# Altium PCB RasPiComputePCB.PcbDoc
Units mm, origin at the board's own origin, x right, y up, seen from the top; angles counter-clockwise.
Board outline 100 x 80 mm, 2 copper layers (Top Layer, Bottom Layer), stack 0.579 mm thick; 25 components, 131 nets, 353 pads, 0 vias.
Unrouted connection lines stored in the file: 150.
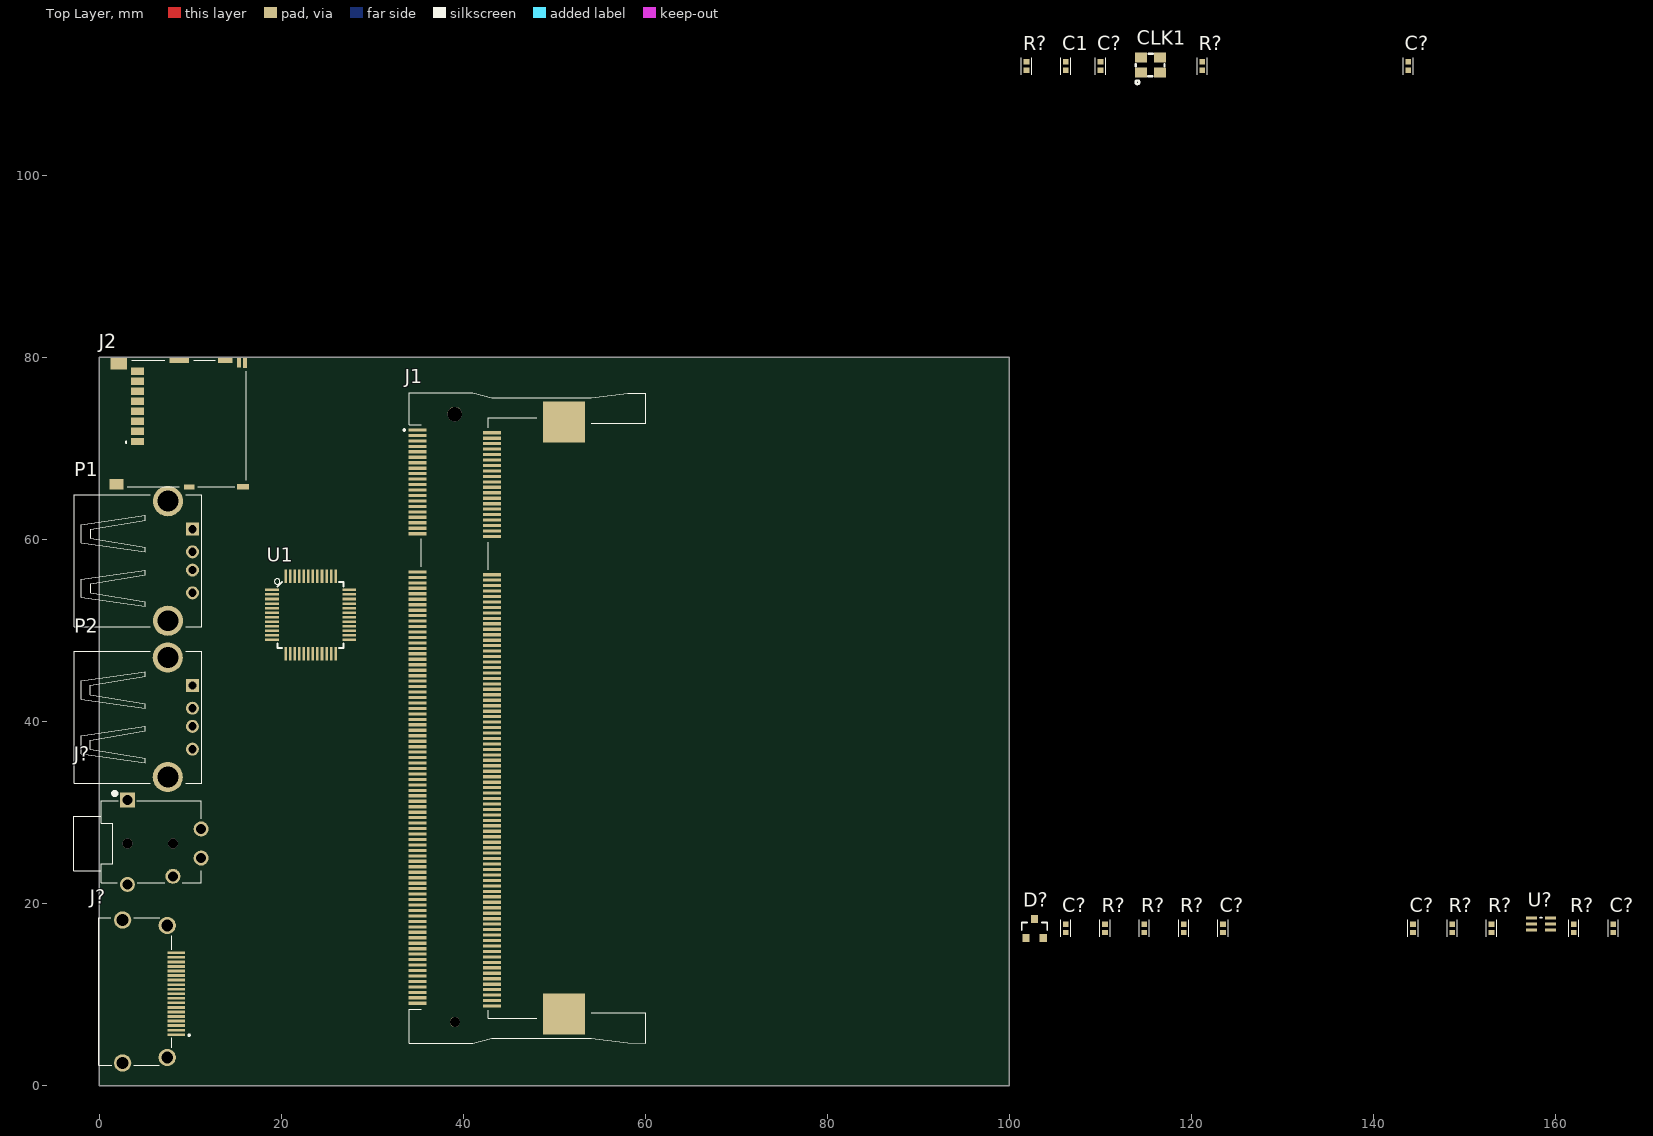
[diagram p0: Top Layer view]
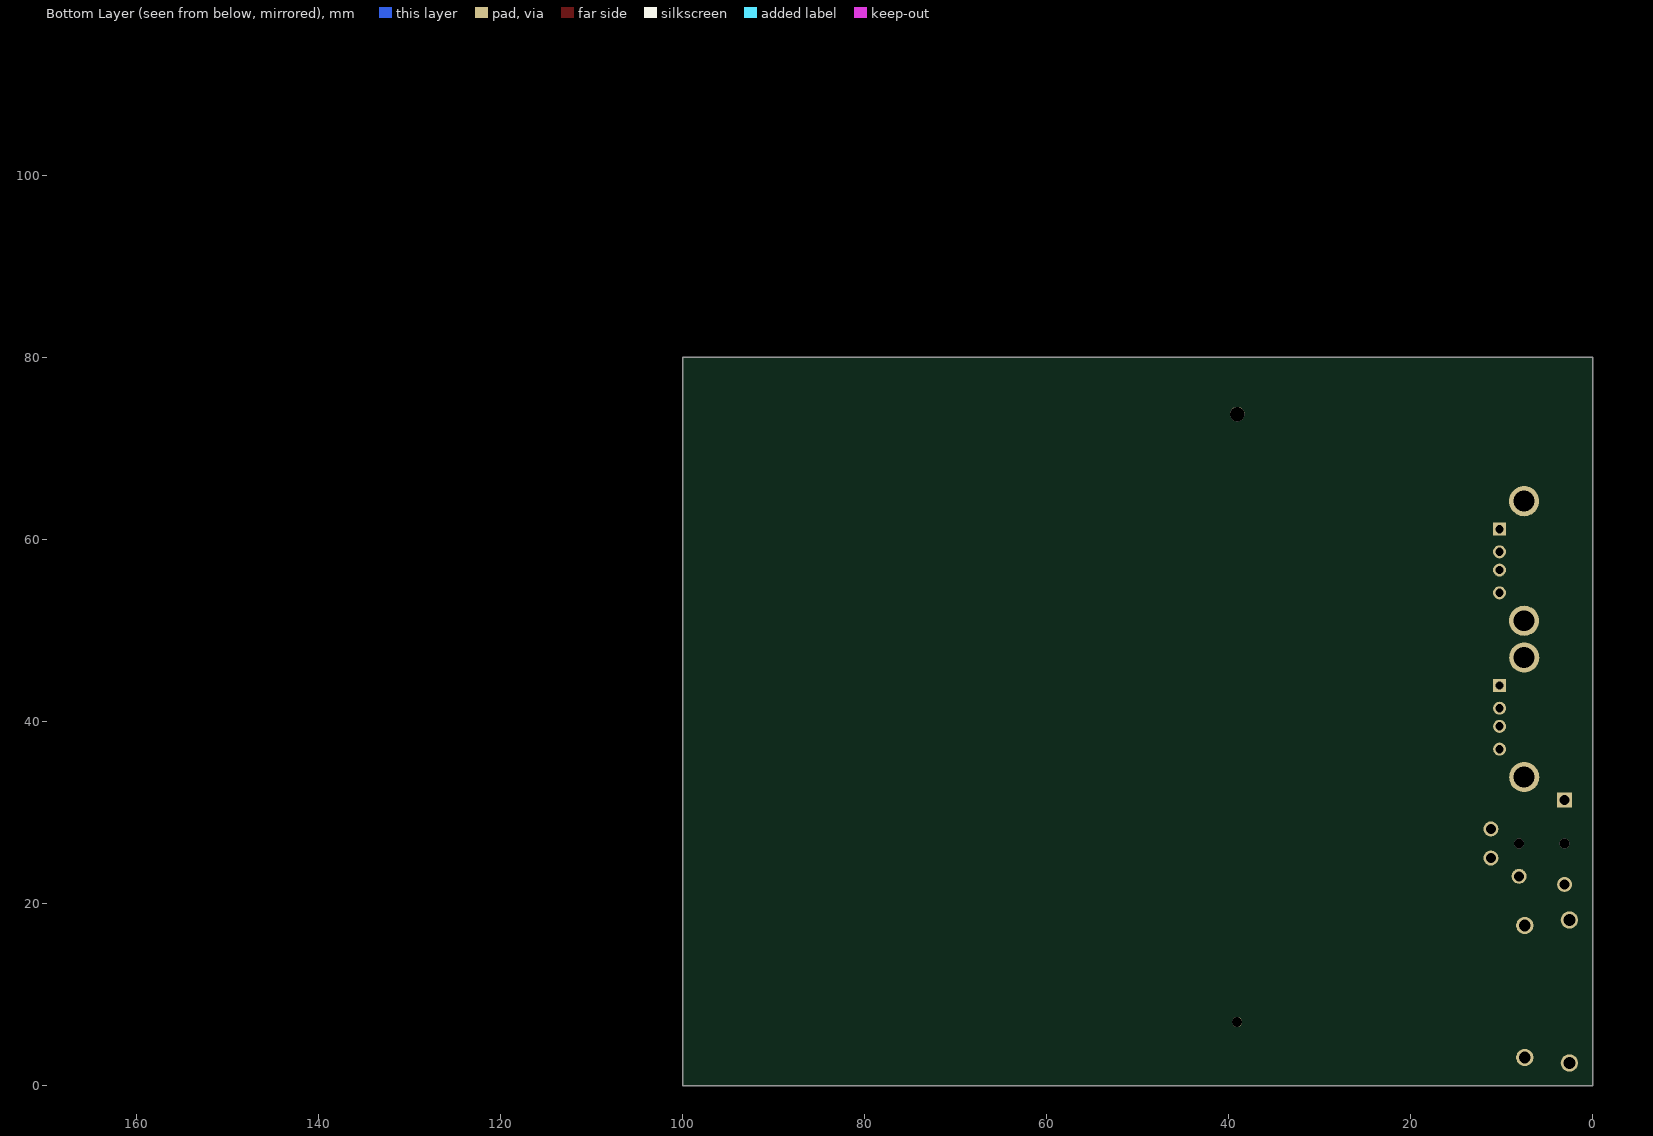
[diagram p1: Bottom Layer view, seen from below]

## Layer stack, top to bottom
Top Solder: solder mask 0.0102, Solder Resist, Dk 3.5
Top Layer: signal copper 0.0356
Dielectric 1: core 0.508, FR-4, Dk 4.2
Bottom Layer: signal copper 0.0356
Bottom Solder: solder mask 0.0102, Solder Resist, Dk 3.5

## Board outline
0,0 100,0 100,80 0,80

## Design rules (kind name [scope] priority, off if disabled: settings)
Clearance 90ohm_RF [InDifferentialPairClass('90Ohm_USB') vs InPolygon] p1: gap=0.762 ignorepadtopadclearanceinfootprint=FALSE
Clearance [All] p2: gap=0.178 ignorepadtopadclearanceinfootprint=FALSE
DiffPairsRouting [InDifferentialPairClass('90Ohm_USB')] p1: maxlimit=0.508 minlimit=0.178 mostfreqgap=0.178 toplayer_minwidth=0.279 toplayer_maxwidth=0.432 toplayer_prefwidth=0.432 bottomlayer_minwidth=0.279 bottomlayer_maxwidth=0.432 bottomlayer_prefwidth=0.432 maxuncoupledlength=12.7
PolygonConnect [All] p1: connectstyle=Relief reliefconductorwidth=0.254 reliefentries=4 polygonreliefangle="90 Angle" airgapwidth=0.254
RoomDefinition AUDIO [InComponentClass('AUDIO')] p1: confinementstyle=ConfineIn formatcopy=TRUE lockcomponents=FALSE outline 101.138,1.424 168.931,1.424 168.931,116.257 101.138,116.257
RoomDefinition USB_HUB [InComponentClass('USB_HUB')] p2: confinementstyle=ConfineIn formatcopy=TRUE lockcomponents=FALSE outline -106.507,-91.794 -55.707,-91.794 -55.707,-66.394 -106.507,-66.394
RoomDefinition Connectors [InComponentClass('Connectors')] p3: confinementstyle=ConfineIn formatcopy=TRUE lockcomponents=FALSE outline -106.507,-91.794 -55.707,-91.794 -55.707,-66.394 -106.507,-66.394
RoutingVias [All] p1: holewidth=0.711 width=1.27 viastyle="Through Hole" minholewidth=0.711 minwidth=1.27 maxholewidth=0.711 maxwidth=1.27
SolderMaskExpansion [All] p1: expansion=0.102
Width [All] p1: maxlimit=0.762 minlimit=0.178 preferedwidth=0.279 minimp=50.000000 maximp=50.000000 favimp=50.000000
29 further rules are at their usual default settings.

## Classes and differential pairs
component class USB_HUB: C1 C? CLK1 P1 P2 R? U1
component class Connectors: J1 J2 J?
differential pair class 90Ohm_USB: DS0_USB1 DS0_USB2 US0_USB0
component class AUDIO: C? D? J? R? U?
differential pair DS0_USB1: +DS0_USB1_P -DS0_USB1_N
differential pair US0_USB0: +US0_USB0_P -US0_USB0_N
differential pair DS0_USB2: +DS0_USB2_P -DS0_USB2_N

## Components (designator, comment, footprint, x,y, rotation, side; value= is the part's Value field where it differs from the comment)
C1 "0.01uF" 0402C 106.218,112.016 r90 top
C? "100nF" 0402C 110.028,112.016 r90 top
C? "100nF" 0402C 143.861,112.016 r90 top
C? "100nF" 0402C 106.218,17.274 r90 top
C? "47uF" 0402C 123.49,17.274 r90 top
C? "47uF" 0402C 166.365,17.274 r90 top
C? "100nF" 0402C 144.369,17.274 r90 top
CLK1 "ASE-48.000MHZ-LC-T" ASE-48.000MHZ-LC-T 115.514,112.117 r0 top
D? "BAV99" SOT23-3 102.789,17.197 r0 top
J1 "1717254-1" TE_1717254-1_1717254-1(Primary) 39.08,40.386 r90 top
J2 "2201778-1" TE_2201778-1 8.966,72.746 r270 top
J? "5-1903015-1" TE_5-1903015-1_5-1903015-1(Primary) 8.484,10.334 r270 top
J? "SJ-43515TS" CUI_SJ-43515TS 5.715,26.594 r0 top
P1 "87520-0010BLF" FCI_87520-0010BLF 7.552,57.642 r270 top
P2 "87520-0010BLF" FCI_87520-0010BLF 7.544,40.462 r270 top
R? "100k" 0402C 121.204,112.016 r90 top
R? "649" 0402C 101.9,112.016 r90 top
R? "1.8k" 0402C 114.854,17.274 r90 top
R? "100" 0402C 110.536,17.274 r90 top
R? "220" 0402C 119.172,17.274 r90 top
R? "1.8k" 0402C 153.005,17.274 r90 top
R? "100" 0402C 148.687,17.274 r90 top
R? "220" 0402C 162.047,17.274 r90 top
U1 "CY7C65632-48AXCT" TQFP-48 23.241,51.714 r0 top
U? "NC7WZ16P6X" SOT65P210X110-6N 158.44,17.756 r0 top

## Footprints (in the part's own frame and the unit in brackets; to place one, negate y for a bottom-side part, rotate by r counter-clockwise, add the part's x,y. Pads: shape width x height; smd on the part's side, far side on the other; paste and mask are expansions set on the pad)
0402C [mm]
  rect 0.6x0.62 smd: 1(-0.46,0) 2(0.46,0)
  silkscreen extent -0.94,-0.56 0.94,0.56, body extent -0.5,-0.25 0.5,0.25, height 0.55
ASE-48.000MHZ-LC-T [mm] "OSC XO 48.000MHZ CMOS SMD"
  rect 1.3x1.1 smd: 1(-1.025,-0.825) 2(1.075,-0.825) 3(1.075,0.825) 4(-1.025,0.825)
  silkscreen extent -1.63,-2.08 1.55,1.25
CUI_SJ-43515TS [mm]
  rect 1.65x1.65 hole 1.1: 1(-2.6,4.8)
  round 1.65 hole 1.1: 2(2.4,-3.6) 3(5.5,1.6) 4(-2.6,-4.5) 5(5.5,-1.6)
  round 1.1 hole 1.1 unplated: None(-2.6,0) None(2.4,0)
  silkscreen extent -8.5,-4.3 5.5,5.7, body extent -8.02,-5.33 5.98,4.87, height 5.29
FCI_87520-0010BLF [mm]
  rect 1.428x1.428 hole 0.92: 1(-3.5,2.71)
  round 1.428 hole 0.92: 2(-1,2.71) 3(1,2.71) 4(3.5,2.71)
  round 3.316 hole 2.3: P1(-6.57,0) P2(6.57,0)
  silkscreen extent -7.25,-10.3 7.25,3.75, body extent -7.25,-10.19 7.25,3.81, height 7.69
SOT23-3 [mm]
  rect 0.8x0.9 smd: 1(-0.95,-1) 2(0.95,-1) 3(0,1.1)
  silkscreen extent -1.4,-0.1 1.4,0.7, body extent -1.5,-1.39 1.5,1.44, height 1.2
SOT65P210X110-6N [mil]
  rect 46x14 smd: 1(-41,26) 2(-41,0) 3(-41,-26) 4(41,-26) 5(41,0) 6(41,26)
  silkscreen extent -5,27 5,28, body extent -47,-43 47,43, height 43
TE_5-1903015-1_5-1903015-1(Primary) [mm]
  rect 0.3x1.9 smd: 1(4.75,0) 2(4.25,0) 3(3.75,0) 4(3.25,0) 5(2.75,0) 6(2.25,0) 7(1.75,0) 8(1.25,0) 9(0.75,0) 10(0.25,0) 11(-0.25,0) 12(-0.75,0) 13(-1.25,0) 14(-1.75,0) 15(-2.25,0) 16(-2.75,0) 17(-3.25,0) 18(-3.75,0) 19(-4.25,0)
  round 1.9 hole 1.3: SH1(7.25,-1) SH2(-7.25,-1) SH3(-7.85,-5.9) SH4(7.85,-5.9)
  silkscreen extent -8.1,-8.5 8.1,1.5, body extent -8.1,-9.53 8.1,0.32, height 6.1
TE_1717254-1_1717254-1(Primary) [mm]
  rect 0.35x2 smd: 1(31.65,4.1) 2(31.35,-4.1) 3(31.05,4.1) 4(30.75,-4.1) 5(30.45,4.1) 6(30.15,-4.1) 7(29.85,4.1) 8(29.55,-4.1) 9(29.25,4.1) 10(28.95,-4.1) 11(28.65,4.1) 12(28.35,-4.1) 13(28.05,4.1) 14(27.75,-4.1) 15(27.45,4.1) 16(27.15,-4.1) 17(26.85,4.1) 18(26.55,-4.1) 19(26.25,4.1) 20(25.95,-4.1) 21(25.65,4.1) 22(25.35,-4.1) 23(25.05,4.1) 24(24.75,-4.1) 25(24.45,4.1) 26(24.15,-4.1) 27(23.85,4.1) 28(23.55,-4.1) 29(23.25,4.1) 30(22.95,-4.1) 31(22.65,4.1) 32(22.35,-4.1) 33(22.05,4.1) 34(21.75,-4.1) 35(21.45,4.1) 36(21.15,-4.1) 37(20.85,4.1) 38(20.55,-4.1) 39(20.25,4.1) 40(19.95,-4.1) 41(16.05,4.1) 42(15.75,-4.1) 43(15.45,4.1) 44(15.15,-4.1) 45(14.85,4.1) 46(14.55,-4.1) 47(14.25,4.1) 48(13.95,-4.1) 49(13.65,4.1) 50(13.35,-4.1) 51(13.05,4.1) 52(12.75,-4.1) 53(12.45,4.1) 54(12.15,-4.1) 55(11.85,4.1) 56(11.55,-4.1) 57(11.25,4.1) 58(10.95,-4.1) 59(10.65,4.1) 60(10.35,-4.1) 61(10.05,4.1) 62(9.75,-4.1) 63(9.45,4.1) 64(9.15,-4.1) 65(8.85,4.1) 66(8.55,-4.1) 67(8.25,4.1) 68(7.95,-4.1) 69(7.65,4.1) 70(7.35,-4.1) 71(7.05,4.1) 72(6.75,-4.1) 73(6.45,4.1) 74(6.15,-4.1) 75(5.85,4.1) 76(5.55,-4.1) 77(5.25,4.1) 78(4.95,-4.1) 79(4.65,4.1) 80(4.35,-4.1) 81(4.05,4.1) 82(3.75,-4.1) 83(3.45,4.1) 84(3.15,-4.1) 85(2.85,4.1) 86(2.55,-4.1) 87(2.25,4.1) 88(1.95,-4.1) 89(1.65,4.1) 90(1.35,-4.1) 91(1.05,4.1) 92(0.75,-4.1) 93(0.45,4.1) 94(0.15,-4.1) 95(-0.15,4.1) 96(-0.45,-4.1) 97(-0.75,4.1) 98(-1.05,-4.1) 99(-1.35,4.1) 100(-1.65,-4.1) 101(-1.95,4.1) 102(-2.25,-4.1) 103(-2.55,4.1) 104(-2.85,-4.1) 105(-3.15,4.1) 106(-3.45,-4.1) 107(-3.75,4.1) 108(-4.05,-4.1) 109(-4.35,4.1) 110(-4.65,-4.1) 111(-4.95,4.1) 112(-5.25,-4.1) 113(-5.55,4.1) 114(-5.85,-4.1) 115(-6.15,4.1) 116(-6.45,-4.1) 117(-6.75,4.1) 118(-7.05,-4.1) 119(-7.35,4.1) 120(-7.65,-4.1) 121(-7.95,4.1) 122(-8.25,-4.1) 123(-8.55,4.1) 124(-8.85,-4.1) 125(-9.15,4.1) 126(-9.45,-4.1) 127(-9.75,4.1) 128(-10.05,-4.1) 129(-10.35,4.1) 130(-10.65,-4.1) 131(-10.95,4.1) 132(-11.25,-4.1) 133(-11.55,4.1) 134(-11.85,-4.1) 135(-12.15,4.1) 136(-12.45,-4.1) 137(-12.75,4.1) 138(-13.05,-4.1) 139(-13.35,4.1) 140(-13.65,-4.1) 141(-13.95,4.1) 142(-14.25,-4.1) 143(-14.55,4.1) 144(-14.85,-4.1) 145(-15.15,4.1) 146(-15.45,-4.1) 147(-15.75,4.1) 148(-16.05,-4.1) 149(-16.35,4.1) 150(-16.65,-4.1) 151(-16.95,4.1) 152(-17.25,-4.1) 153(-17.55,4.1) 154(-17.85,-4.1) 155(-18.15,4.1) 156(-18.45,-4.1) 157(-18.75,4.1) 158(-19.05,-4.1) 159(-19.35,4.1) 160(-19.65,-4.1) 161(-19.95,4.1) 162(-20.25,-4.1) 163(-20.55,4.1) 164(-20.85,-4.1) 165(-21.15,4.1) 166(-21.45,-4.1) 167(-21.75,4.1) 168(-22.05,-4.1) 169(-22.35,4.1) 170(-22.65,-4.1) 171(-22.95,4.1) 172(-23.25,-4.1) 173(-23.55,4.1) 174(-23.85,-4.1) 175(-24.15,4.1) 176(-24.45,-4.1) 177(-24.75,4.1) 178(-25.05,-4.1) 179(-25.35,4.1) 180(-25.65,-4.1) 181(-25.95,4.1) 182(-26.25,-4.1) 183(-26.55,4.1) 184(-26.85,-4.1) 185(-27.15,4.1) 186(-27.45,-4.1) 187(-27.75,4.1) 188(-28.05,-4.1) 189(-28.35,4.1) 190(-28.65,-4.1) 191(-28.95,4.1) 192(-29.25,-4.1) 193(-29.55,4.1) 194(-29.85,-4.1) 195(-30.15,4.1) 196(-30.45,-4.1) 197(-30.75,4.1) 198(-31.05,-4.1) 199(-31.35,4.1) 200(-31.65,-4.1)
  round 1.1 hole 1.1 unplated: None(-33.4,0)
  round 1.6 hole 1.6 unplated: None(33.4,0)
  rect 4.5x4.6 smd: S1(-32.55,-12) S2(32.55,-12)
  silkscreen extent -35.75,-21 35.75,5.65, body extent -35.75,-21.04 35.75,5, height 5.23
TE_2201778-1 [mm]
  rect 0.8x1.4 smd: 1(1.965,-4.75) 2(0.865,-4.75) 3(-0.235,-4.75) 4(-1.335,-4.75) 5(-2.435,-4.75) 6(-3.535,-4.75) 7(-4.635,-4.75) 8(-5.735,-4.75)
  rect 1.15x0.45 smd: 9(-6.7,7.075)
  rect 1.1x0.45 smd: 10(-6.725,6.415)
  rect 1.35x1.8 smd: 11(-6.625,-6.8)
  rect 0.65x2.14 smd: 12(-6.95,-0.17)
  rect 0.65x1.6 smd: 13(-6.95,4.91)
  rect 0.65x1.3 smd: 14(6.95,6.85)
  rect 0.6x1.15 smd: 15(6.975,0.925)
  rect 1.16x1.5 smd: 16(6.695,-7.05)
  silkscreen extent -6.98,-6.11 6.98,7.2, body extent -7.04,-8.96 6.99,7.24, height 1.8
TQFP-48 [mm]
  rect 1.5x0.28 smd: 1(-4.25,2.75) 2(-4.25,2.25) 3(-4.25,1.75) 4(-4.25,1.25) 5(-4.25,0.75) 6(-4.25,0.25) 7(-4.25,-0.25) 8(-4.25,-0.75) 9(-4.25,-1.25) 10(-4.25,-1.75) 11(-4.25,-2.25) 12(-4.25,-2.75) 25(4.25,-2.75) 26(4.25,-2.25) 27(4.25,-1.75) 28(4.25,-1.25) 29(4.25,-0.75) 30(4.25,-0.25) 31(4.25,0.25) 32(4.25,0.75) 33(4.25,1.25) 34(4.25,1.75) 35(4.25,2.25) 36(4.25,2.75)
  rect 0.28x1.5 smd: 13(-2.75,-4.25) 14(-2.25,-4.25) 15(-1.75,-4.25) 16(-1.25,-4.25) 17(-0.75,-4.25) 18(-0.25,-4.25) 19(0.25,-4.25) 20(0.75,-4.25) 21(1.25,-4.25) 22(1.75,-4.25) 23(2.25,-4.25) 24(2.75,-4.25) 37(2.75,4.25) 38(2.25,4.25) 39(1.75,4.25) 40(1.25,4.25) 41(0.75,4.25) 42(0.25,4.25) 43(-0.25,4.25) 44(-0.75,4.25) 45(-1.25,4.25) 46(-1.75,4.25) 47(-2.25,4.25) 48(-2.75,4.25)
  silkscreen extent -3.97,-3.63 3.63,3.97, body extent -4.5,-4.5 4.5,4.5, height 1.1

## Part data
C1 C? C? C? C? C? C?: library part C, "Capacitor", Power_WV_SRF=25V
CLK1: "OSC XO 48.000MHZ CMOS SMD"
D?: "Diode, Small Signal; 250 mA; 1.25 V _Max._; 300 mW; 430 K/W; 70 V; 6 nS _Max._", Package="SOT-23-3 Vishay", Availability=Unavailable, MF="ON Semiconductor", MP=BAV99, Price="0.07 USD", SnapEDA_Link=https://www.snapeda.com/parts/BAV99/ON%20Semiconductor/view-part/?ref=snap
J1: "EMBOSS ASS'Y DDR SODIMM SOCKET", Package=None, Centerline_Pitch=".6 mm[.024 in]", Digi-Key_Part_Number=A111047CT-ND, Digi-Key_Purchase_URL=https://www.digikey.com/product-detail/en/te-connectivity-amp-connectors/1717254-1/A111047CT-ND/4142431?utm_source=snapeda&utm_medium=aggregator&utm_campaign=symbol, EU_RoHS_Compliance=Compliant, Link=http://www.te.com/usa-en/product-1717254-1.html, MF="TE Connectivity", MP=1717254-1, Number_of_Positions=200, Product_Type=Socket, SnapEDA_Link=https://www.snapeda.com/parts/1717254-1/TE%20Connectivity%20AMP%20Connectors/view-part/?ref=snap
J2: "MICRO SD PUSH PUSH LOW PROFILE TYPE", Package=None, Availability=Good, Centerline_Pitch="1.1 mm[.04 in]", EU_RoHS_Compliance=Compliant, Link=http://www.te.com/usa-en/product-2201778-1.html, MF="TE Connectivity", MP=2201778-1, Number_of_Positions=8, Price="2.18 USD", Product_Type="Removable Memory Products", SnapEDA_Link=https://www.snapeda.com/parts/2201778-1/TE%20Connectivity%20AMP%20Connectors/view-part/?ref=snap
J?: "Conn HDMI RCP 19 POS 0.5mm Solder RA SMD 19 Terminal 1 Port Embossed T/R", Package=None, Availability=Good, EU_RoHS_Compliance=Compliant, Link=http://www.te.com/usa-en/product-5-1903015-1.html, MF="TE Connectivity", MP=5-1903015-1, Price="1.43 USD", SnapEDA_Link=https://www.snapeda.com/parts/5-1903015-1/TE%20Connectivity%20AMP%20Connectors/view-part/?ref=snap
J?: "4 Conductor PCB Mount Low Profile 3.5 mm Audio Jack", Package=None, Availability=Good, MF=CUI, MP=SJ-43515TS, Price="0.73 USD", SnapEDA_Link=https://www.snapeda.com/parts/SJ-43515TS/CUI/view-part/?ref=snap
P1 P2: "87520 Series Single Port 4 Contact Unshielded Board Lock USB-A Receptacle", Package=None, Digi-Key_Part_Number=609-1045-ND, Digi-Key_Purchase_URL=https://www.digikey.com/product-detail/en/amphenol-fci/87520-0010BLF/609-1045-ND/1001359?utm_source=snapeda&utm_medium=aggregator&utm_campaign=symbol, MF="Amphenol ICC", MP=87520-0010BLF, SnapEDA_Link=https://www.snapeda.com/parts/87520-0010BLF/Amphenol%20ICC/view-part/?ref=snap
R? R? R? R? R? R? R? R?: library part R, "Resistor", Tolerance=5%
U?: "NC7WZ16 Series 5.5 V Surface Mount TinyLogic UHS Dual Buffer - SC-70-6", Package="SC-70-6 ON Semiconductor", Availability=Good, MF="ON Semiconductor", MP=NC7WZ16P6X, Price="0.13 USD", SnapEDA_Link=https://www.snapeda.com/parts/NC7WZ16P6X/ON%20Semiconductor/view-part/?ref=snap

## Nets (pads, with @x,y where several pads share a name; then routed paths per layer and width w, separated by ;. In a path a pad name is that pad's centre, name@x,y a point inside that pad or via, vN(x,y) a via of type N, cw(c..) or ccw(c..) an arc to the next point about the centre after c; other vN are vias at no path point)
1V8: J1.183 J1.184 J1.185 J1.186
3V3: C1.1 CLK1.4 D?.2 J1.191 J1.192 J1.193 J1.194 R?.1@121.204,111.556 U1.1 U1.7 U1.12 U1.16 U1.19 U1.23 U1.32 U1.34 U1.37 U1.38 U1.44 U?.5
5V: C?.1@110.028,111.556 C?.1@143.861,111.556 P1.1 P2.1
DS0_USB1_N: P1.2 U1.5
DS0_USB1_P: P1.3 U1.6
DS0_USB2_N: P2.2 U1.9
DS0_USB2_P: P2.3 U1.10
DS0_USB3_N: U1.17
DS0_USB3_P: U1.18
DS0_USB4_N: U1.21
DS0_USB4_P: U1.22
GND: C1.2 C?.1@106.218,16.814 C?.1@144.369,16.814 C?.2@110.028,112.476 C?.2@143.861,112.476 CLK1.2 D?.1 J1.1 J1.7 J1.8 J1.13 J1.14 J1.19 J1.20 J1.25 J1.26 J1.31 J1.32 J1.37 J1.38 J1.43 J1.44 J1.49 J1.50 J1.55 J1.56 J1.61 J1.62 J1.67 J1.68 J1.73 J1.74 J1.79 J1.80 J1.85 J1.86 J1.91 J1.92 J1.97 J1.98 J1.103 J1.104 J1.109 J1.110 J1.115 J1.116 J1.121 J1.122 J1.127 J1.133 J1.134 J1.139 J1.140 J1.145 J1.146 J1.151 J1.152 J1.157 J1.163 J1.164 J1.168 J1.169 J1.170 J1.181 J1.182 J1.187 J1.188 J1.195 J1.196 J1.S1 J1.S2 J2.6 J2.11 J2.12 J2.13 J2.14 J2.15 J2.16 J?.4@3.115,22.094 P1.4 P2.4 R?.1@101.9,111.556 R?.1@110.536,16.814 R?.1@114.854,16.814 R?.1@148.687,16.814 R?.1@153.005,16.814 U1.2 U1.8 U1.13 U1.20 U1.24 U1.25 U1.27 U1.33 U?.2
NetC?_1: C?.1@166.365,16.814 C?.2@144.369,17.734 R?.2@148.687,17.734 R?.2@162.047,17.734
NetC?_2: C?.2@123.49,17.734 J?.3@11.215,28.194 R?.2@114.854,17.734
NetCLK1_3: CLK1.3 U1.14
NetD?_3: D?.3 J?.1@3.115,31.394
NetJ1_2: J1.2
NetJ1_3: J1.3
NetJ1_4: J1.4 J1.6 J2.4
NetJ1_5: J1.5
NetJ1_9: J1.9
NetJ1_10: J1.10 J2.5
NetJ1_11: J1.11
NetJ1_12: J1.12 J2.3
NetJ1_15: J1.15
NetJ1_16: J1.16 J2.7
NetJ1_17: J1.17
NetJ1_18: J1.18 J2.8
NetJ1_21: J1.21
NetJ1_22: J1.22 J2.1
NetJ1_23: J1.23
NetJ1_24: J1.24 J2.2
NetJ1_27: J1.27
NetJ1_28: J1.28
NetJ1_29: J1.29
NetJ1_30: J1.30
NetJ1_33: J1.33
NetJ1_34: J1.34
NetJ1_35: J1.35
NetJ1_36: J1.36
NetJ1_39: J1.39 J1.40
NetJ1_41: J1.41 J1.42
NetJ1_45: J1.45
NetJ1_46: J1.46
NetJ1_47: J1.47
NetJ1_48: J1.48
NetJ1_51: J1.51
NetJ1_52: J1.52
NetJ1_53: J1.53
NetJ1_54: J1.54
NetJ1_57: J1.57
NetJ1_58: J1.58
NetJ1_59: J1.59
NetJ1_60: J1.60
NetJ1_63: J1.63
NetJ1_64: J1.64
NetJ1_65: J1.65
NetJ1_66: J1.66
NetJ1_69: J1.69
NetJ1_70: J1.70 U?.1
NetJ1_71: J1.71
NetJ1_72: J1.72
NetJ1_75: J1.75
NetJ1_76: J1.76
NetJ1_77: J1.77
NetJ1_78: J1.78
NetJ1_81: J1.81
NetJ1_82: J1.82
NetJ1_83: J1.83
NetJ1_84: J1.84 U?.3
NetJ1_87: J1.87
NetJ1_88: J1.88
NetJ1_89: J1.89
NetJ1_90: J1.90
NetJ1_93: J1.93
NetJ1_94: J1.94
NetJ1_95: J1.95
NetJ1_96: J1.96
NetJ1_99: J1.99
NetJ1_100: J1.100
NetJ1_101: J1.101
NetJ1_102: J1.102
NetJ1_105: J1.105
NetJ1_106: J1.106
NetJ1_107: J1.107
NetJ1_108: J1.108
NetJ1_111: J1.111
NetJ1_112: J1.112
NetJ1_113: J1.113
NetJ1_114: J1.114
NetJ1_117: J1.117
NetJ1_118: J1.118
NetJ1_119: J1.119
NetJ1_120: J1.120
NetJ1_123: J1.123
NetJ1_125: J1.125
NetJ1_129: J1.129
NetJ1_131: J1.131
NetJ1_135: J1.135
NetJ1_136: J1.136
NetJ1_137: J1.137
NetJ1_138: J1.138
NetJ1_141: J1.141
NetJ1_142: J1.142
NetJ1_143: J1.143
NetJ1_144: J1.144
NetJ1_147: J1.147
NetJ1_148: J1.148
NetJ1_149: J1.149
NetJ1_150: J1.150
NetJ1_153: J1.153
NetJ1_155: J1.155
NetJ1_159: J1.159
NetJ1_161: J1.161
NetJ1_166: J1.166
NetJ1_171: J1.171
NetJ1_172: J1.172
NetJ1_173: J1.173
NetJ1_174: J1.174
NetJ1_175: J1.175
NetJ1_176: J1.176
NetJ1_177: J1.177
NetJ1_178: J1.178
NetJ1_179: J1.179
NetJ1_180: J1.180
NetJ1_189: J1.189 J1.190
NetJ1_197: J1.197 J1.198 J1.199 J1.200
NetR?_1: R?.1@162.047,16.814 U?.6
NetR?_2: R?.2@121.204,112.476 U1.39
US0_USB0_N: J1.167 U1.3
US0_USB0_P: J1.165 U1.4
pads on no net: C?.1@123.49,16.814 C?.2@106.218,17.734 C?.2@166.365,17.734 CLK1.1 J1.124 J1.126 J1.128 J1.130 J1.132 J1.154 J1.156 J1.158 J1.160 J1.162 J1.None J2.9 J2.10 J?.1@8.484,5.584 J?.2 J?.3@8.484,6.584 J?.4@8.484,7.084 J?.5 J?.6 J?.7 J?.8 J?.9 J?.10 J?.11 J?.12 J?.13 J?.14 J?.15 J?.16 J?.17 J?.18 J?.19 J?.None J?.SH1 J?.SH2 J?.SH3 J?.SH4 P1.P1 P1.P2 P2.P1 P2.P2 R?.1@119.172,16.814 R?.2@101.9,112.476 R?.2@110.536,17.734 R?.2@119.172,17.734 R?.2@153.005,17.734 U1.11 U1.15 U1.26 U1.28 U1.29 U1.30 U1.31 U1.35 U1.36 U1.40 U1.41 U1.42 U1.43 U1.45 U1.46 U1.47 U1.48 U?.4

## Silkscreen, mask and mechanical layers (free items; w line width, h text height)
Mechanical 1:
  the board outline again, w0.254

## Text inside footprints (layer, text, board x,y; h text height)
J?: Mechanical 11 "PCB EDGE" at -0.047,17.827 h1.88 r90